# Altium PCB Soft_latch.PcbDoc
Units mil, origin at the board's own origin, x right, y up, seen from the top; angles counter-clockwise.
Board outline 6000 x 4000 mil, 2 copper layers (Top Layer, Bottom Layer); 1 components, 0 nets, 12 pads, 0 vias.
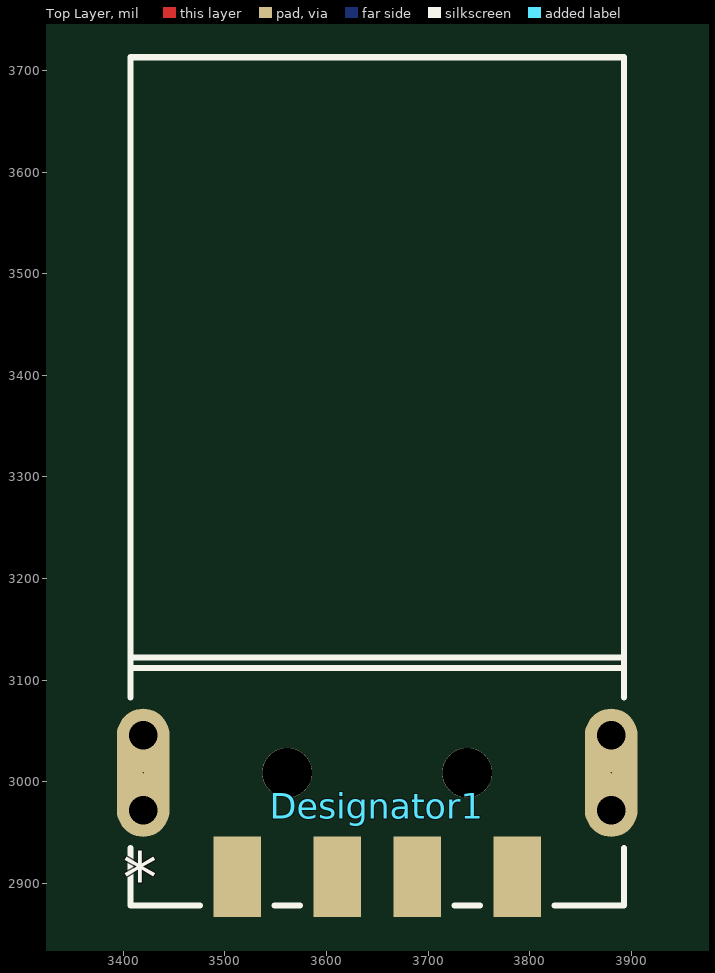
[diagram p0: Top Layer view]
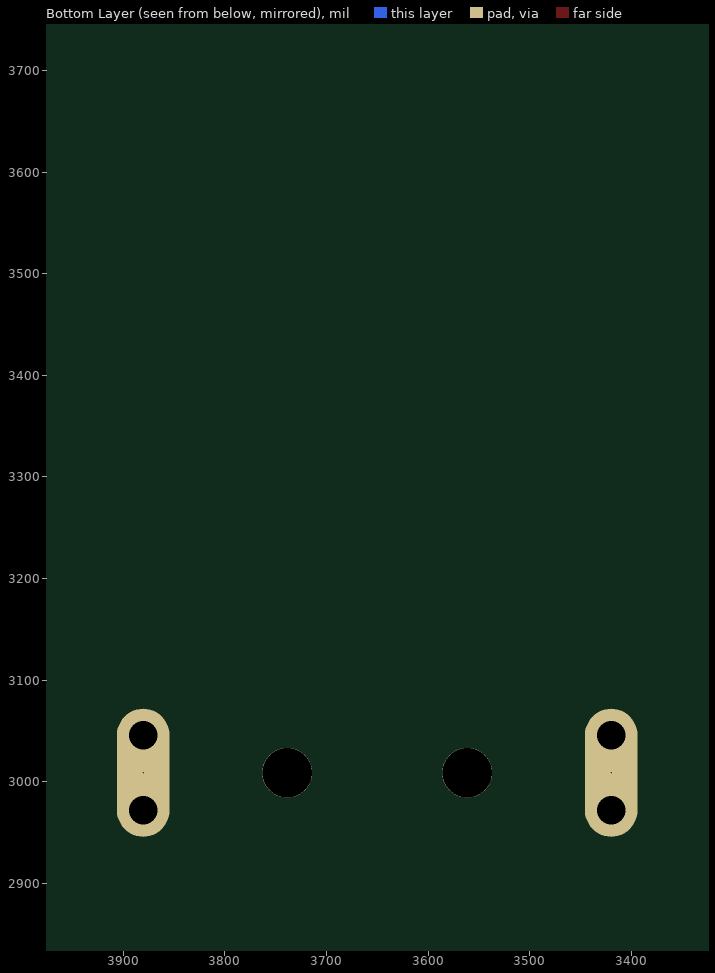
[diagram p1: Bottom Layer view, seen from below]

## Layer stack, top to bottom
Top Solder: solder mask 0.4, Solder Resist, Dk 3.5
Top Layer: signal copper 1.4
Dielectric 1: dielectric 12.6, FR-4, Dk 4.8
Bottom Layer: signal copper 1.4
Bottom Solder: solder mask 0.4, Solder Resist, Dk 3.5

## Board outline
1000,1000 7000,1000 7000,5000 1000,5000

## Design rules (kind name [scope] priority, off if disabled: settings)
Clearance [All] p1: gap=10 ignorepadtopadclearanceinfootprint=FALSE except(0: Arc-Hole Track-Hole SMDPad-Hole THPad-Hole Via-Hole Fill-Hole Poly-Hole Region-Hole Text-Hole)
PolygonConnect [All] p1: connectstyle=Relief reliefconductorwidth=10 reliefentries=4 polygonreliefangle="90 Angle" airgapwidth=10
RoutingVias [All] p1: holewidth=28 width=50 viastyle="Through Hole" minholewidth=28 minwidth=50 maxholewidth=28 maxwidth=50
SolderMaskExpansion [All] p1: expansion=4 istentingtop=FALSE
Width [All] p1: maxlimit=10 minlimit=10 preferedwidth=10
30 further rules are at their usual default settings.

## Components (designator, comment, footprint, x,y, rotation, side; value= is the part's Value field where it differs from the comment)
Designator1 "Comment" CONN_48037-2200_MOL 3650,3000 r0 top

## Footprints (in the part's own frame and the unit in brackets; to place one, negate y for a bottom-side part, rotate by r counter-clockwise, add the part's x,y. Pads: shape width x height; smd on the part's side, far side on the other; paste and mask are expansions set on the pad)
CONN_48037-2200_MOL [mil]
  rect 47x79 smd paste+0 mask+0: 1(-137.8,-93.63) 2(-39.37,-93.63) 3(39.37,-93.63) 4(137.8,-93.63)
  round 49 hole 49 unplated: 7(-88.58,8.73) 8(88.58,8.73)
  oval 52x126 hole 1 mask+0: S_1(-230.32,8.73) S_2(230.32,8.73)
  round 28 hole 28 unplated: S_1_H1(-230.32,45.73) S_1_H2(-230.32,-28.27) S_2_H1(230.32,45.73) S_2_H2(230.32,-28.27)
  Multi-Layer lines w28: -230.32,-28.27 -230.32,45.73 ; 230.32,-28.27 230.32,45.73
  silkscreen extent -243,-122 243,713, body extent 0,0 10,10, height 10

## Nets (pads, with @x,y where several pads share a name; then routed paths per layer and width w, separated by ;. In a path a pad name is that pad's centre, name@x,y a point inside that pad or via, vN(x,y) a via of type N, cw(c..) or ccw(c..) an arc to the next point about the centre after c; other vN are vias at no path point)
pads on no net: Designator1.1 Designator1.2 Designator1.3 Designator1.4 Designator1.7 Designator1.8 Designator1.S_1 Designator1.S_1_H1 Designator1.S_1_H2 Designator1.S_2 Designator1.S_2_H1 Designator1.S_2_H2

## Text inside footprints (layer, text, board x,y; h text height)
Designator1: Mechanical 7 "-0.6in/-15.24mm" at 4208,2804.5 h25; Mechanical 7 "-0.211in/-5.35mm" at 4008,2999.18 h25; Mechanical 7 "0.591in/15.011mm" at 2992,3400 h25; Mechanical 7 "0.234in/5.944mm" at 2704.5,2987.5 h25; Mechanical 7 "0.108in/2.75mm" at 3117,3050.37 h25; Mechanical 7 "0.476in/12.09mm" at 3556.25,4128 h25; Mechanical 7 "0.461in/11.7mm" at 3562.5,4028 h25; Mechanical 7 "0in/0mm" at 3217.67,2926.37 h25; Mechanical 7 "0.098in/2.5mm" at 3480.17,3928 h25; Mechanical 7 "Alt 2 Padstyle: OX90Y60D30P" at 3312.5,2123 h50; Mechanical 7 "Alt 1 Padstyle: OX60Y90D30P" at 3312.5,2198 h50; Mechanical 7 "Second Mounting Padstyle: EX49Y49D49P" at 3187.5,2273 h50; Mechanical 7 "Mounting Padstyle: EX60Y60D38" at 3287.5,2348 h50; Mechanical 7 "Second Bottom Row Padstyle: EX55Y55D32P" at 3162.5,2423 h50; Mechanical 7 "Bottom Row Padstyle: EX55Y55D32P" at 3250,2498 h50; Mechanical 7 "2nd Middle Row Padstyle: EX55Y55D32P" at 3200,2573 h50; Mechanical 7 "Middle Row Padstyle: RX47Y79D0T" at 3262.5,2648 h50; Mechanical 7 "Top Row Padstyle:RX47Y79D0T" at 3312.5,2723 h50; Top Overlay "*" at 3399.7,2881.37 h50; Mechanical 13 "*" at 3399.7,2881.37 h50